# Altium PCB DAM16.PcbDoc
Units mm, origin at the board's own origin, x right, y up, seen from the top; angles counter-clockwise.
Board outline 151 x 82 mm, 4 copper layers (Top Layer, MidLayer1, MidLayer2, Bottom Layer), stack 0.778 mm thick; 96 components, 100 nets, 385 pads, 37 vias.
Unrouted connection lines stored in the file: 100.
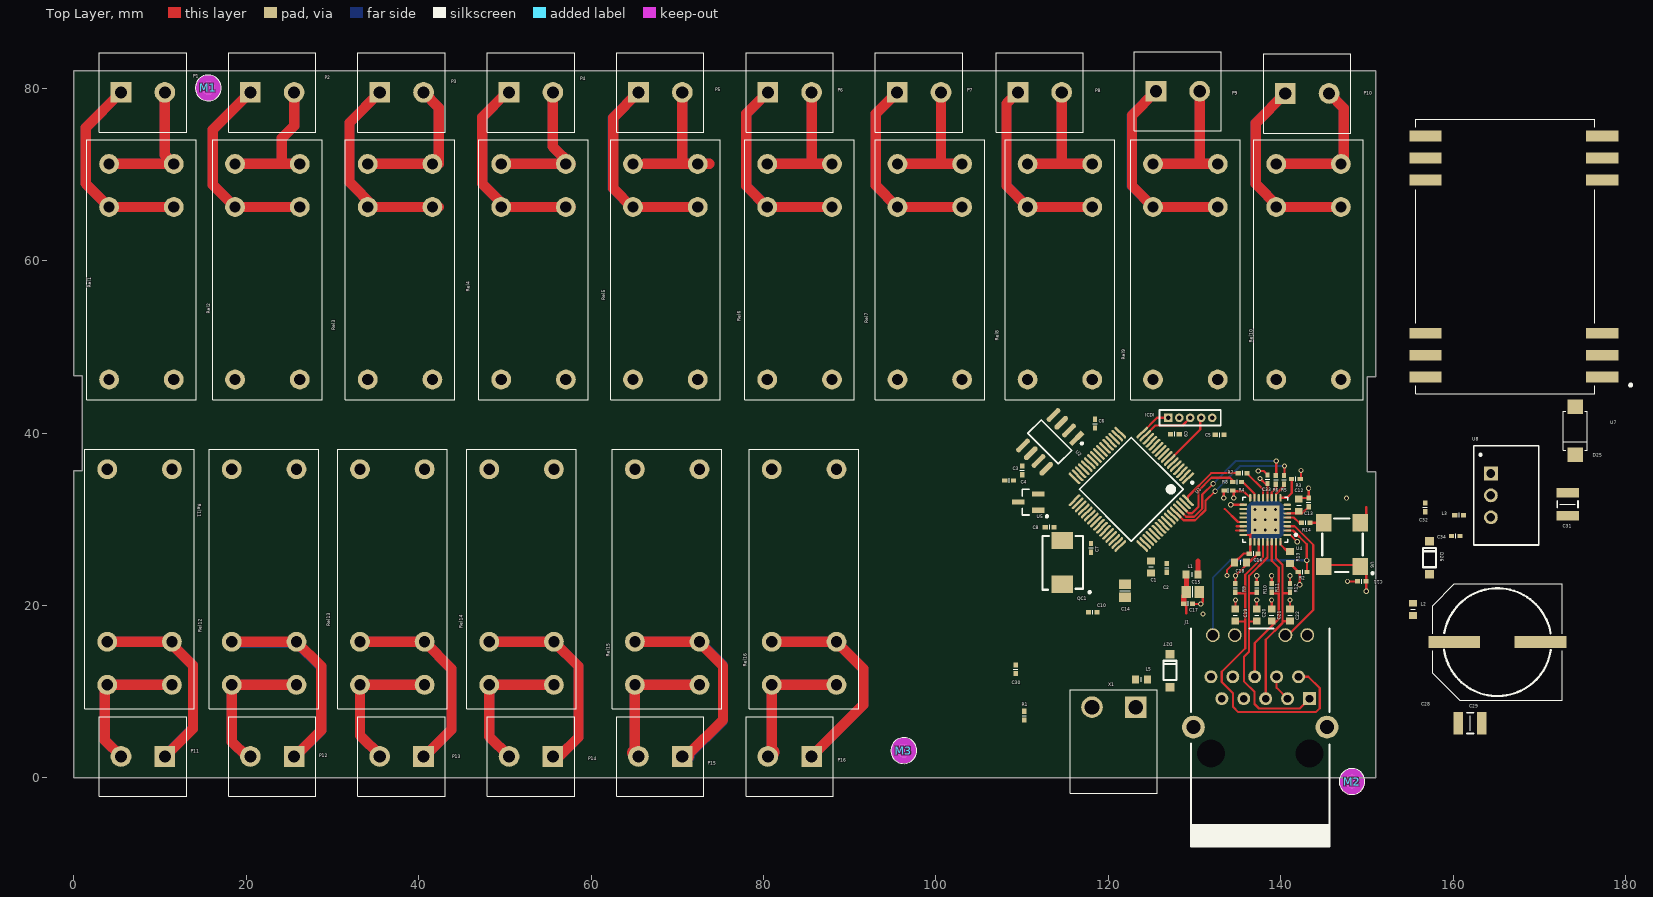
[diagram p0: Top Layer view]
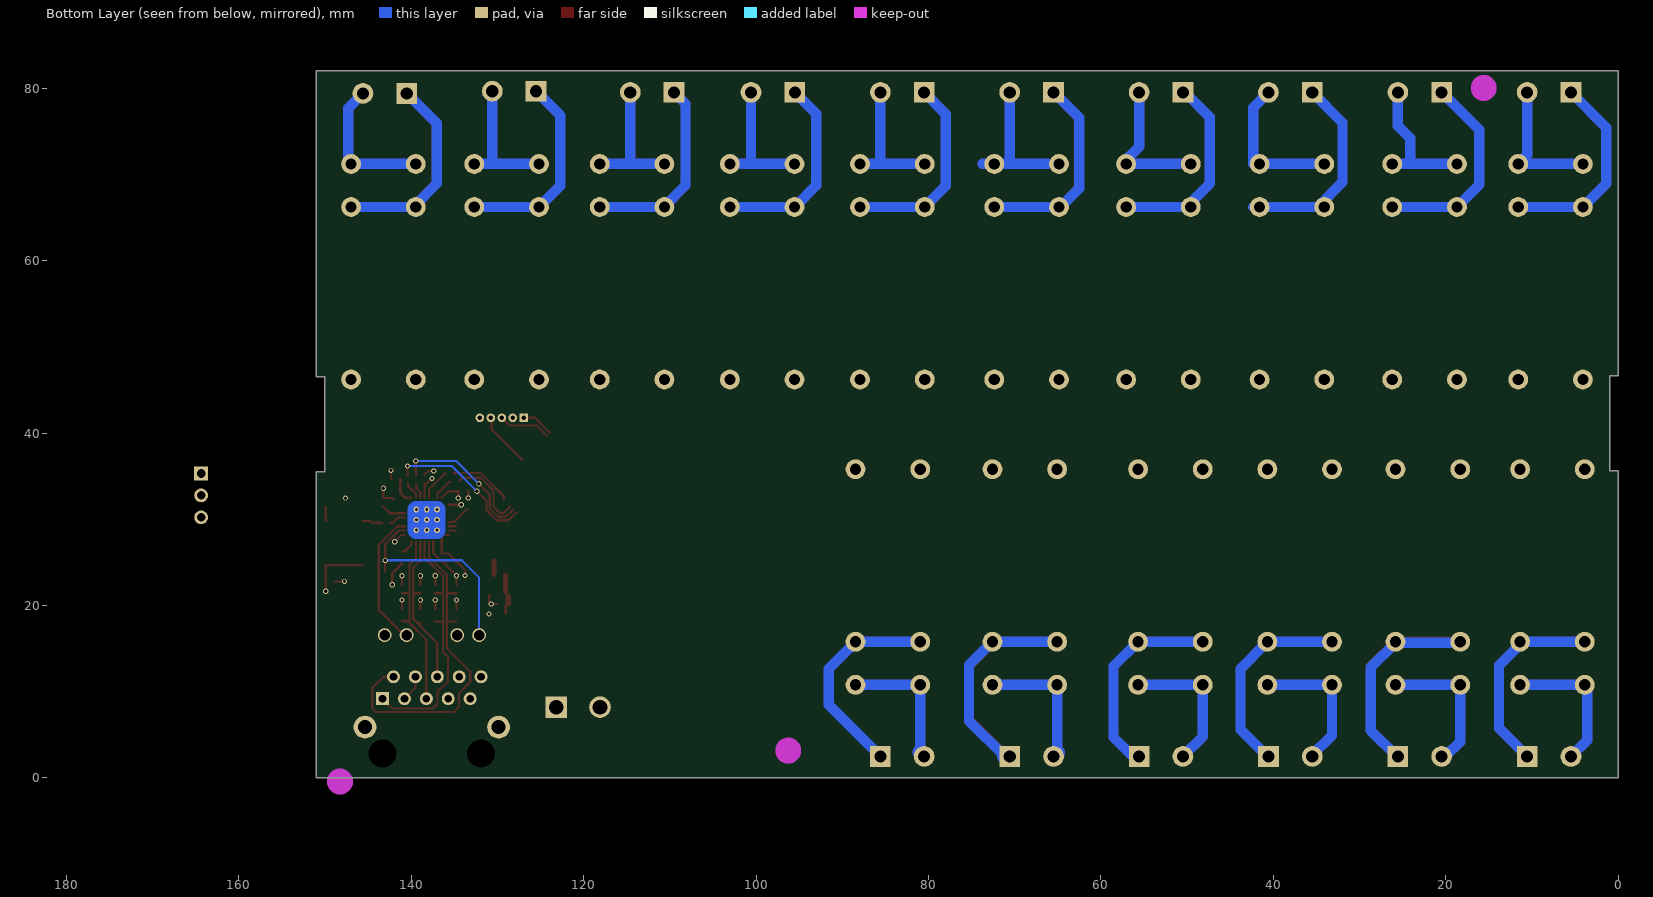
[diagram p1: Bottom Layer view, seen from below]
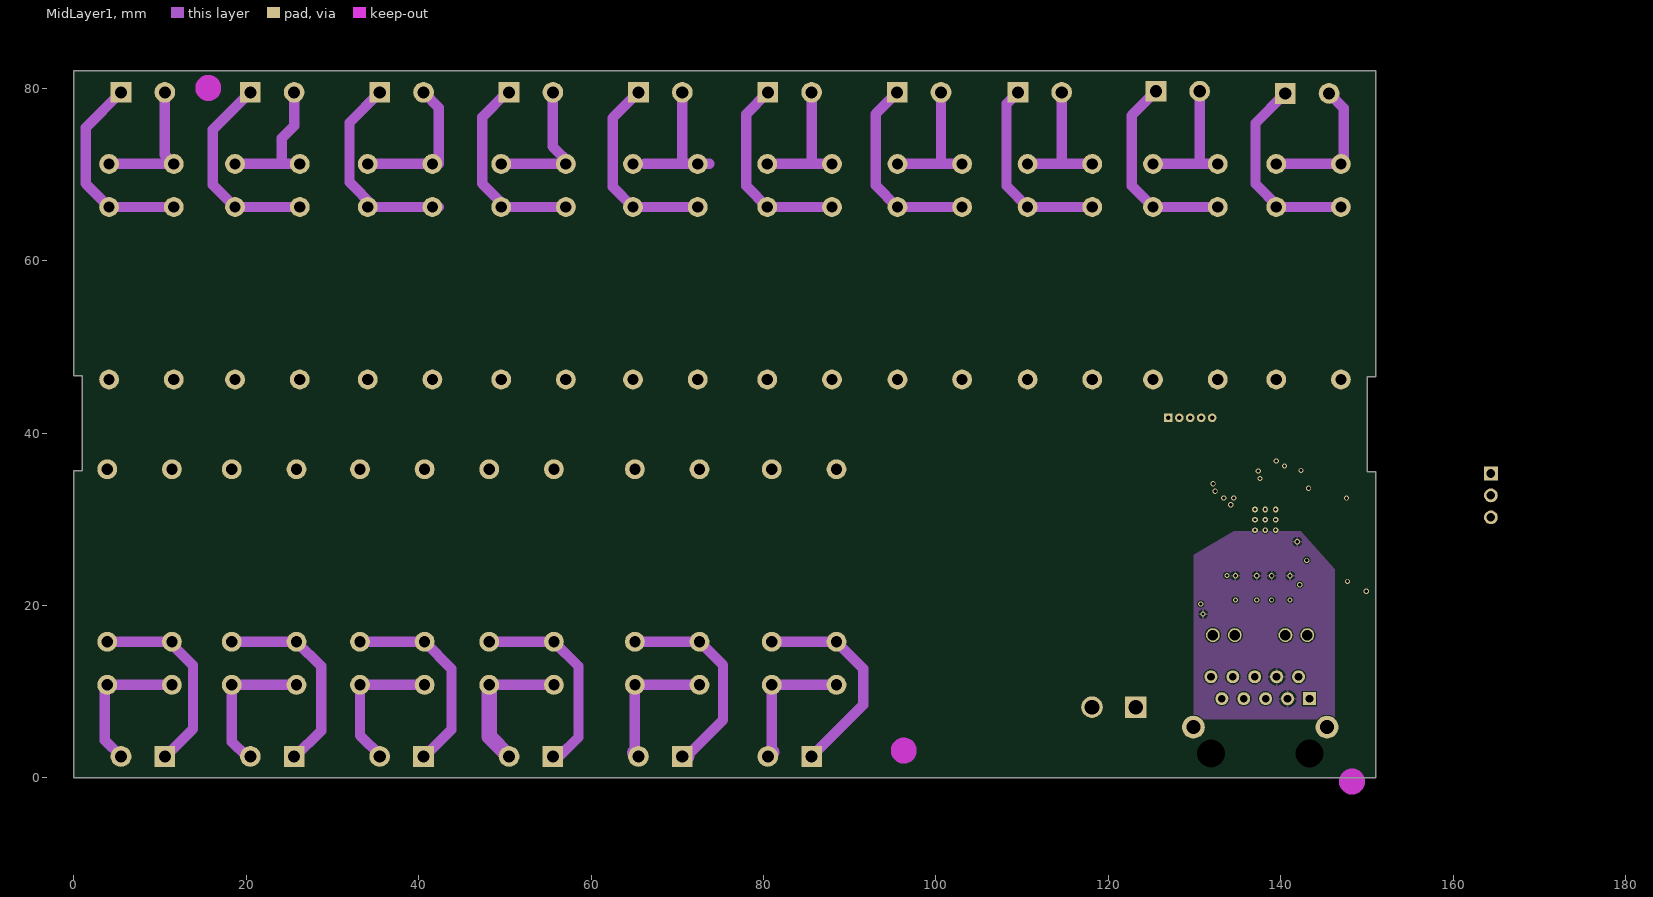
[diagram p2: MidLayer1]
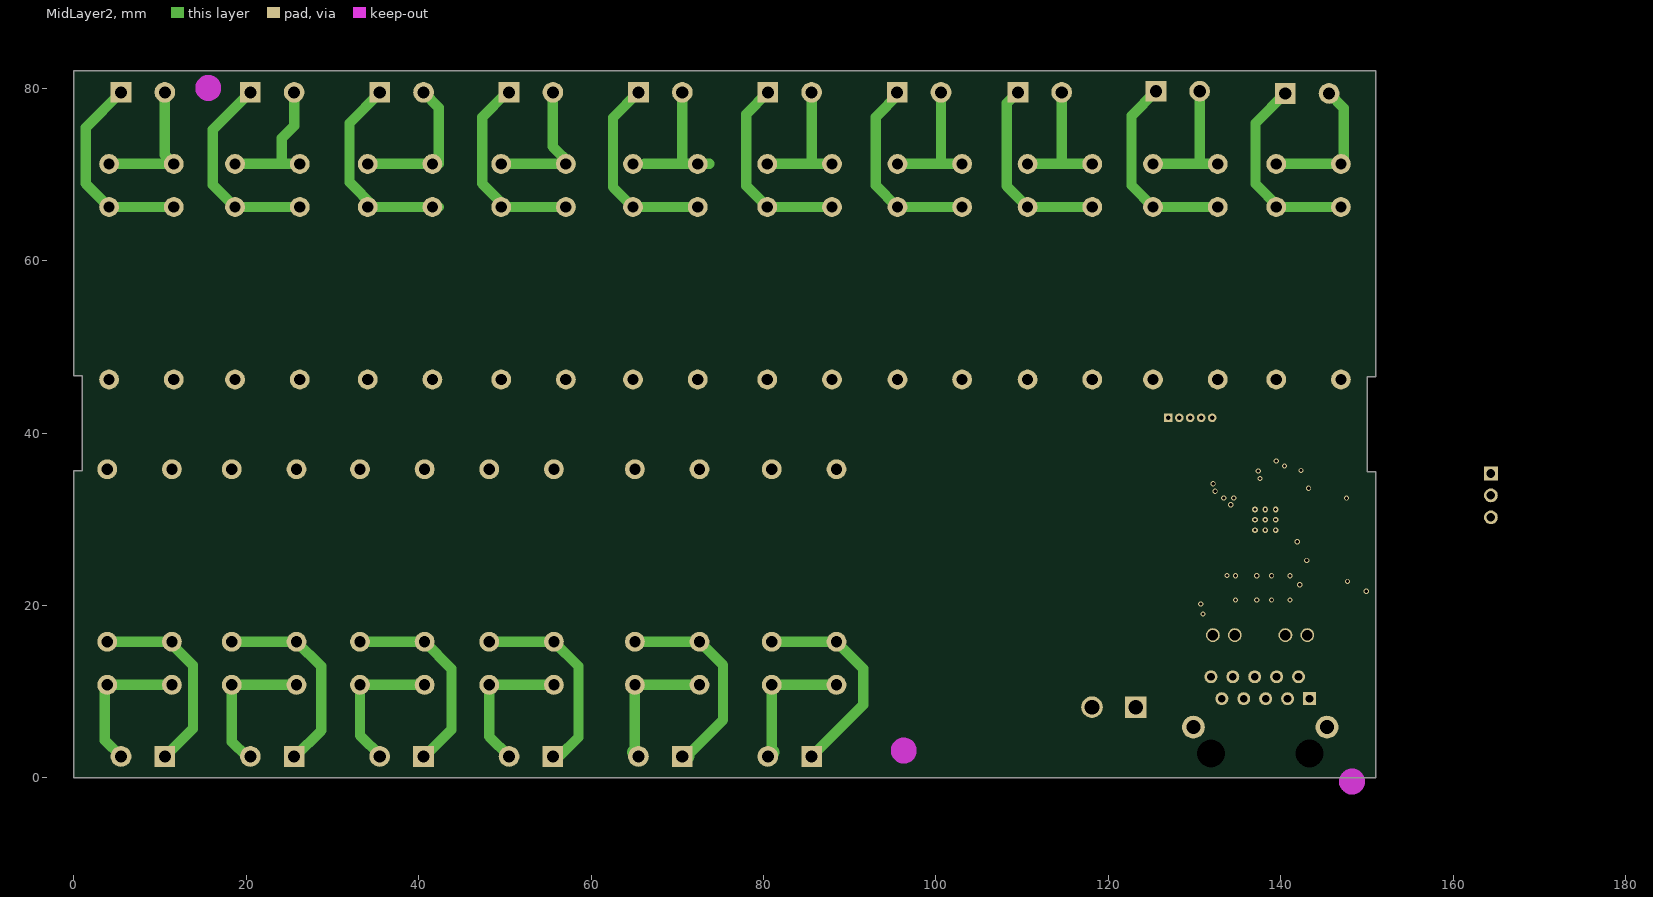
[diagram p3: MidLayer2]

## Layer stack, top to bottom
Top Solder: solder mask 0.0102, Solder Resist, Dk 3.5
Top Layer: signal copper 0.0356
Dielectric 1: core 0.254, FR-4, Dk 4.2
MidLayer1: signal copper 0.036
Dielectric 3: prepreg 0.127, Dk 4.2
MidLayer2: signal copper 0.036
Dielectric 2: core 0.254, Dk 4.2
Bottom Layer: signal copper 0.0356
Bottom Solder: solder mask 0.0102, Solder Resist, Dk 3.5

## Board outline
0,0 0,35.65 1,35.65 1,46.648 0,46.648 0,82 151,82 151,46.507 150,46.507 150,35.509 151,35.509 151,0

## Design rules (kind name [scope] priority, off if disabled: settings)
Clearance [All] p1: gap=0.12
HoleSize [All] p1: absolutevalues=TRUE maxlimit=4 minlimit=0.025 maxpercent=80.000 minpercent=20.000
PolygonConnect [All] p1: connectstyle=Relief reliefconductorwidth=0.254 reliefentries=4 polygonreliefangle="90 Angle" airgapwidth=0.254
RoomDefinition DAM16_Ethernet [InComponentClass('DAM16_Ethernet')] p1: confinementstyle=ConfineIn formatcopy=TRUE lockcomponents=FALSE outline -5.969,-6.096 183.007,-6.096 183.007,88.265 -5.969,88.265
RoomDefinition DAM16_Control [InComponentClass('DAM16_Control')] p2: confinementstyle=ConfineIn formatcopy=TRUE lockcomponents=FALSE outline -8.128,-3.683 183.896,-3.683 183.896,85.725 -8.128,85.725
RoomDefinition DAM16_Relays [InComponentClass('DAM16_Relays')] p3: confinementstyle=ConfineIn formatcopy=TRUE lockcomponents=FALSE outline -3.429,-2.54 191.77,-2.54 191.77,84.328 -3.429,84.328
RoutingVias [All] p1: holewidth=0.711 width=1.27 viastyle="Through Hole" minholewidth=0.3 minwidth=0.5 maxholewidth=0.711 maxwidth=1.27
SilkToBoardRegionClearance [HasFootprint('7499210124A')] p1:
SolderMaskExpansion [All] p1: expansion=0.102
UnpouredPolygon [All] p1: allowunpoured=FALSE
Width [All] p1: maxlimit=4 minlimit=0.254 preferedwidth=0.254
27 further rules are at their usual default settings.

## Classes and differential pairs
component class DAM16_Relays: P1 P2 P3 P4 P5 P6 P7 P8 P9 P10 P11 P12 P13 P14 P15 P16 Rel1 Rel2 Rel3 Rel4 Rel5 Rel6 Rel7 Rel8 Rel9 Rel10 Rel11 Rel12 Rel13 Rel14 Rel15 Rel16
component class DAM16_Control: C1 C2 C3 C4 C5 C6 C7 C8 C9 C10 C28 C29 C30 C31 C32 C34 D25 D26 D27 ICDI L2 L3 L5 M1 M2 M3 QC1 R1 U1 U2 U5 U7 U8 X1
component class DAM16_Ethernet: C11 C12 C13 C14 C15 C16 C17 C18 C19 C20 C21 C22 C33 J1 L1 R2 R3 R4 R5 R6 R7 R8 R9 R10 R11 R12 R13 R14 U4 U6

## Components (designator, comment, footprint, x,y, rotation, side; value= is the part's Value field where it differs from the comment)
C1 "10uF10V_0603" C0603 124.928,24.478 r270 top
C2 "100nF16V_0402" C0402 126.757,24.363 r270 top
C3 "100nF16V_0402" C0402 109.991,35.657 r90 top
C4 "100nF16V_0402" C0402 108.474,34.484 r180 top
C5 "100nF16V_0402" C0402 132.886,39.79 r0 top
C6 "100nF16V_0402" C0402 118.436,41.099 r90 top
C7 "22pF50V_0402" C0402 117.975,26.674 r270 top
C8 "22pF50V_0402" C0402 113.164,29.087 r180 top
C9 "100nF16V_0402" C0402 127.705,39.867 r180 top
C10 "100nF16V_0402" C0402 118.179,19.222 r180 top
C11 "100nF16V_0402" C0402 149.377,22.798 r180 top
C12 "1uF50V_0603" C0603 142.07,31.625 r90 top
C13 "470pF50V_0402" C0402 143.21,31.955 r90 top
C14 "4u7F25V_0805" C0805 121.917,21.706 r270 top
C15 "4u7F25V_0805" C0805 129.792,21.574 r0 top
C16 "100nF25V_0402" C0402 136.83,26.015 r180 top
C17 "100nF25V_0402" C0402 129.232,20.218 r0 top
C18 "22nF50V_0603" C0603 135.32,24.985 r180 top
C19 "10pF50V_0603" C0603 134.7,18.885 r90 top
C20 "10pF50V_0603" C0603 137.193,18.885 r90 top
C21 "10pF50V_0603" C0603 138.92,18.885 r90 top
C22 "10pF50V_0603" C0603 141.05,18.885 r90 top
C28 "470uF25V_POL" Panasonic-H13 165.1,15.748 r180 top
C29 "10uF50V_1210" C1210 161.925,6.35 r0 top
C30 "100nF25V_0402" C0402 109.232,12.607 r90 top
C31 "10uF25V_1210" C1210 173.228,31.75 r90 top
C32 "100nF25V_0402" C0402 156.718,31.369 r270 top
C33 "100nF25V_0402" C0402 138.437,34.648 r90 top
C34 "100nF25V_0402" C0402 160.274,28.067 r0 top
D25 "SMAJ58A-E3/61" DO214A 174.117,40.259 r270 top
D26 "RB160M-30TR" SOD123 157.226,25.527 r90 top
D27 "SD103AW-V-GS08" SOD123 127.127,12.446 r90 top
ICDI "ICDI" HDR1X5-1.27 129.476,41.759 r0 top
J1 "7499210124A" 7499210124A 137.59,2.845 r180 top
L1 "120R4A_0603" L0603 129.69,23.581 r0 top
L2 "300R2A_0603" L0603 155.321,19.558 r90 top
L3 "120R1.2A_0402" P0402 160.655,30.48 r180 top
L5 "10uF2A" L0603 123.825,11.43 r0 top
M1 "Mark" Mark-3mm 15.621,80.01 r0 top
M2 "Mark" Mark-3mm 148.238,-0.413 r0 top
M3 "Mark" Mark-3mm 96.266,3.175 r90 top
P1 "PHOENIX_1715721" Phoenix-2-5_08 8.04,79.5 r0 top
P2 "PHOENIX_1715721" Phoenix-2-5_08 23.04,79.5 r0 top
P3 "PHOENIX_1715721" Phoenix-2-5_08 38.04,79.5 r0 top
P4 "PHOENIX_1715721" Phoenix-2-5_08 53.04,79.5 r0 top
P5 "PHOENIX_1715721" Phoenix-2-5_08 68.04,79.5 r0 top
P6 "PHOENIX_1715721" Phoenix-2-5_08 83.04,79.5 r0 top
P7 "PHOENIX_1715721" Phoenix-2-5_08 98.04,79.5 r0 top
P8 "PHOENIX_1715721" Phoenix-2-5_08 112.04,79.5 r0 top
P9 "PHOENIX_1715721" Phoenix-2-5_08 128.04,79.629 r0 top
P10 "PHOENIX_1715721" Phoenix-2-5_08 143.04,79.375 r0 top
P11 "PHOENIX_1715721" Phoenix-2-5_08 8.04,2.5 r180 top
P12 "PHOENIX_1715721" Phoenix-2-5_08 23.04,2.5 r180 top
P13 "PHOENIX_1715721" Phoenix-2-5_08 38.04,2.5 r180 top
P14 "PHOENIX_1715721" Phoenix-2-5_08 53.04,2.5 r180 top
P15 "PHOENIX_1715721" Phoenix-2-5_08 68.04,2.5 r180 top
P16 "PHOENIX_1715721" Phoenix-2-5_08 83.04,2.5 r180 top
QC1 "7A-8.000MAAJ-T" TXC_7A 114.637,24.992 r90 top
R1 "10k_0402" R0402 110.236,7.239 r270 top
R2 "10k_0402" R0402 142.5,23.875 r0 top
R3 "10k_0402" R0402 141.727,34.661 r0 top
R4 "1k5_0402" R0402 133.915,33.329 r180 top
R5 "10R_0402" R0402 140.342,34.567 r270 top
R6 "10R_0402" R0402 139.403,34.567 r90 top
R7 "10R_0402" R0402 135.55,35.35 r180 top
R8 "10R_0402" R0402 134.907,34.318 r180 top
R9 "49R9_0402" R0402 134.7,22.045 r90 top
R10 "49R9_0402" R0402 137.193,22.045 r90 top
R11 "49R9_0402" R0402 138.92,22.045 r90 top
R12 "49R9_0402" R0402 141.05,22.045 r90 top
R13 "12k1_0603" R0603(1608) 141.05,25.565 r90 top
R14 "33R_0402" R0402 142.875,29.591 r180 top
Rel1 "Omron_G5RL-1A-E-HR" Omron-G5RL-HR 7.874,56.2 r90 top
Rel2 "Omron_G5RL-1A-E-HR" Omron-G5RL-HR 22.479,56.2 r90 top
Rel3 "Omron_G5RL-1A-E-HR" Omron-G5RL-HR 37.855,56.2 r90 top
Rel4 "Omron_G5RL-1A-E-HR" Omron-G5RL-HR 53.332,56.2 r90 top
Rel5 "Omron_G5RL-1A-E-HR" Omron-G5RL-HR 68.616,56.2 r90 top
Rel6 "Omron_G5RL-1A-E-HR" Omron-G5RL-HR 84.191,56.2 r90 top
Rel7 "Omron_G5RL-1A-E-HR" Omron-G5RL-HR 99.281,56.2 r90 top
Rel8 "Omron_G5RL-1A-E-HR" Omron-G5RL-HR 114.372,56.2 r90 top
Rel9 "Omron_G5RL-1A-E-HR" Omron-G5RL-HR 128.918,56.2 r90 top
Rel10 "Omron_G5RL-1A-E-HR" Omron-G5RL-HR 143.199,56.2 r90 top
Rel11 "Omron_G5RL-1A-E-HR" Omron-G5RL-HR 7.652,25.8 r270 top
Rel12 "Omron_G5RL-1A-E-HR" Omron-G5RL-HR 22.098,25.8 r270 top
Rel13 "Omron_G5RL-1A-E-HR" Omron-G5RL-HR 36.957,25.8 r270 top
Rel14 "Omron_G5RL-1A-E-HR" Omron-G5RL-HR 51.943,25.8 r270 top
Rel15 "Omron_G5RL-1A-E-HR" Omron-G5RL-HR 68.834,25.8 r270 top
Rel16 "Omron_G5RL-1A-E-HR" Omron-G5RL-HR 84.709,25.8 r270 top
U1 "PIC32MX695F512H-80I/PT" TQFP-64_N1 122.642,33.469 r225 top
U2 "25LC1024-I_SM" SOP8_N 113.199,38.968 r225 top
U4 "LAN8741-EN" 32M1-A_M 138.181,29.936 r180 top
U5 "11AA02E48T-I_TT" SOT23_M 110.707,31.991 r180 top
U6 "TXC-7W-50.000MBB-T" TXC_7W 147.066,27.051 r90 top
U7 "AG-9700-2BR" Ag9700-2BR 167.005,60.452 r90 top
U8 "R-783.3-0.5" R-783_3-0_5 164.338,32.766 r270 top
X1 "WR-TBL3127" WR-TBL-3127 120.627,8.215 r180 top

## Footprints (in the part's own frame and the unit in brackets; to place one, negate y for a bottom-side part, rotate by r counter-clockwise, add the part's x,y. Pads: shape width x height; smd on the part's side, far side on the other; paste and mask are expansions set on the pad)
32M1-A_M [mm] "QFN, 32-Leads, Body 5x5mm, Pitch 0.5mm, IPC Low Density"
  rect 0.9x0.25 smd: 1(-2.55,1.75)
  oval 0.9x0.25 smd: 2(-2.55,1.25) 3(-2.55,0.75) 4(-2.55,0.25) 5(-2.55,-0.25) 6(-2.55,-0.75) 7(-2.55,-1.25) 8(-2.55,-1.75) 17(2.55,-1.75) 18(2.55,-1.25) 19(2.55,-0.75) 20(2.55,-0.25) 21(2.55,0.25) 22(2.55,0.75) 23(2.55,1.25) 24(2.55,1.75)
  oval 0.25x0.9 smd: 9(-1.75,-2.55) 10(-1.25,-2.55) 11(-0.75,-2.55) 12(-0.25,-2.55) 13(0.25,-2.55) 14(0.75,-2.55) 15(1.25,-2.55) 16(1.75,-2.55) 25(1.75,2.55) 26(1.25,2.55) 27(0.75,2.55) 28(0.25,2.55) 29(-0.25,2.55) 30(-0.75,2.55) 31(-1.25,2.55) 32(-1.75,2.55)
  rect 3.3x3.3 smd: 33(0,0)
  silkscreen extent -3.68,-2.6 2.6,2.6, body extent -2.58,-2.58 2.58,2.58, height 1
7499210124A [mm] "Connector; PCB Jack, Thru-Hole; RJ45,POE; Shielded with Lightpipes; Right Angle"
  rect 1.5x1.5 hole 0.9: 1(-5.715,-6.35)
  round 1.5 hole 0.9: 2(-4.445,-8.89) 3(-3.175,-6.35) 4(-1.905,-8.89) 5(-0.635,-6.35) 6(0.635,-8.89) 7(1.905,-6.35) 8(3.175,-8.89) 9(4.445,-6.35) 10(5.715,-8.89)
  round 1.6 hole 1.2: 11(-5.465,-13.72) 12(-2.925,-13.72) 13(2.946,-13.72) 14(5.486,-13.72)
  round 2.65 hole 1.6: MH1(-7.745,-3.05) MH2(7.745,-3.05)
  round 2.95 hole 3.25 unplated: MH3(-5.715,0) MH4(5.715,0)
  silkscreen extent -8.02,-14.5 8.02,10.8, body extent -8.27,-14.51 8.13,10.79, height 13.81
Ag9700-2BR [mm] "Silvertel, Ag9700-Small"
  rect 1.25x3.75 smd: 1(-13.97,-10.25) 2(-11.43,-10.25) 3(-8.89,-10.25) 4(8.89,-10.25) 5(11.43,-10.25) 6(13.97,-10.25) 7(13.97,10.25) 8(11.43,10.25) 9(8.89,10.25) 10(-8.89,10.25) 11(-11.43,10.25) 12(-13.97,10.25)
  silkscreen extent -15.9,-13.69 15.9,11.35, body extent -15.9,-9.4 15.9,11.35, height 18
C0402 [mm] "Chip Capacitor, Body 1.0x0.5mm, IPC High Density"
  rect 0.6x0.5 smd: 1(-0.5,0) 2(0.5,0)
  silkscreen extent 0,-0.25 0,0.25, body extent -0.5,-0.25 0.5,0.25, height 0.5
C0603 [mm] "Chip Capacitor, 0603"
  rect 0.8x0.9 smd: 1(-0.7,0) 2(0.7,0)
  silkscreen extent 0,-0.25 0,0.25, body extent -0.8,-0.4 0.8,0.4, height 0.8
C0805 [mm] "Chip Capacitor, Body 2.0x1.3mm, IPC High Density"
  rect 1.1x1.4 smd: 1(-0.75,0) 2(0.75,0)
  silkscreen extent 0,-0.64 0,0.64, body extent -0.5,-0.25 0.5,0.25, height 0.5
C1210 [mm] "Chip Capacitor, Body 3.2x2.5mm, IPC High Density"
  rect 1.1x2.6 smd: 1(-1.35,0) 2(1.35,0)
  silkscreen extent -0.4,-1.2 0.4,1.2, body extent -1.6,-1.25 1.6,1.25, height 1.35
DO214A [mm] "Diode; 2 Leads"
  rect 1.7x1.8 smd: 1(2.8,0) 2(-2.8,0)
  silkscreen extent -2.25,-1.4 2.25,1.4, body extent -2.25,-1.4 2.25,1.4, height 2.3
HDR1X5-1.27 [mm] "Connector; Header; 5 Position"
  rect 1x1 hole 0.5: 1(-2.54,0)
  round 1 hole 0.5: 2(-1.27,0) 3(0,0) 4(1.27,0) 5(2.54,0)
  silkscreen extent -3.55,-0.9 3.55,0.9, body extent -3.56,-0.89 3.56,0.89, height 7
L0603 [mm] "Chip Ferrit, 0603"
  rect 0.8x0.9 smd: 1(-0.7,0) 2(0.7,0)
  silkscreen extent 0,-0.25 0,0.25, body extent -0.8,-0.4 0.8,0.4, height 0.8
Mark-3mm [mm]
  round 1.6 smd paste-2: 0(0,0)
  Keep-Out Layer circle w2: c0,0 r0.5
  silkscreen extent -1.5,-1.5 1.5,1.5
Omron-G5RL-HR [mm] "Omron-G5RL-HR series relay"
  round 2.3 hole 1.3: 1(-10,-3.75) 2(-10,3.75) 3(10,-3.75) 3(10,3.75) 4(15,-3.75) 4(15,3.75)
  silkscreen extent -12.32,-6.35 17.78,6.35, body extent -12.32,-6.35 16.68,6.35, height 15.9
P0402 [mm] "Chip, Body 1.0x0.5mm"
  rect 0.6x0.5 smd: 1(-0.5,0) 2(0.5,0)
  silkscreen extent 0,-0.25 0,0.25, body extent -0.55,-0.3 0.55,0.3, height 0.55
Panasonic-H13 [mm] "SMD electrolytic, Panasonic"
  rect 6x1.4 smd: 1(5,0) 2(-5,0)
  silkscreen extent -7.5,-6.75 7.5,6.75, body extent -7.5,-6.75 7.5,6.75, height 13
Phoenix-2-5_08 [mm] "Phoenix, 1715721"
  rect 2.4x2.4 hole 1.4: 1(-2.54,0)
  round 2.4 hole 1.4: 2(2.54,0)
  silkscreen extent -5.06,-4.6 5.06,4.6, body extent -5.05,-5.19 5.85,4.61, height 14.2
R0402 [mm] "Chip Resistor, Body 1.0x0.5mm"
  rect 0.6x0.5 smd: 1(-0.5,0) 2(0.5,0)
  silkscreen extent 0,-0.25 0,0.25, body extent -0.5,-0.24 0.5,0.26, height 0.4
R0603(1608) [mm] "Chip Resistor, 0603"
  rect 0.8x0.9 smd: 1(-0.7,0) 2(0.7,0)
  body extent -0.8,-0.4 0.8,0.4, height 0.5
R-783_3-0_5 [mm] "Recon DC-DC"
  rect 1.6x1.6 hole 1: 1(-2.54,0)
  round 1.6 hole 1: 2(0,0) 3(2.54,0)
  silkscreen extent -5.75,-2 5.75,5.55, body extent -5.72,-2.03 5.71,5.59, height 10.2
SOD123 [mm]
  rect 1x1 smd: 1(1.905,0) 2(-1.905,0)
  silkscreen extent -1.1,-0.76 1.14,0.76, body extent -1.4,-0.85 1.4,0.88, height 1.4
SOP8_N [mm] "SOIC, 8-Leads, Body 4.9x3.9mm, Pitch 1.27mm, IPC Medium Density"
  rect 2x0.6 smd: 1(-2.5,1.905)
  oval 2x0.6 smd: 2(-2.5,0.635) 3(-2.5,-0.635) 4(-2.5,-1.905) 5(2.5,-1.905) 6(2.5,-0.635) 7(2.5,0.635) 8(2.5,1.905)
  silkscreen extent -2.62,-2.5 1.1,2.88, body extent -3,-2.54 3,2.54, height 1.7
SOT23_M [mm] "SOT23, 3-Leads, Body 2.9x1.3mm, Pitch 0.95mm, Lead Span 2.3mm - Reverse Pinning, IPC Low Density"
  rect 1.45x0.6 smd: 1(1.175,0) 2(-1.175,-0.95) 3(-1.175,0.95)
  silkscreen extent -2.28,-1.5 0.7,1.78, body extent -1.15,-1.5 1.15,1.5, height 1.1
TQFP-64_N1 [mm] "64-Pin Thin Plastic Quad Flat Pack 0.5 mm Pitch, 1.0/0.1 mm Lead Form, IPC Medium Density"
  rect 1.8x0.3 smd: 1(-5.55,3.75)
  oval 1.8x0.3 smd: 2(-5.55,3.25) 3(-5.55,2.75) 4(-5.55,2.25) 5(-5.55,1.75) 6(-5.55,1.25) 7(-5.55,0.75) 8(-5.55,0.25) 9(-5.55,-0.25) 10(-5.55,-0.75) 11(-5.55,-1.25) 12(-5.55,-1.75) 13(-5.55,-2.25) 14(-5.55,-2.75) 15(-5.55,-3.25) 16(-5.55,-3.75) 33(5.55,-3.75) 34(5.55,-3.25) 35(5.55,-2.75) 36(5.55,-2.25) 37(5.55,-1.75) 38(5.55,-1.25) 39(5.55,-0.75) 40(5.55,-0.25) 41(5.55,0.25) 42(5.55,0.75) 43(5.55,1.25) 44(5.55,1.75) 45(5.55,2.25) 46(5.55,2.75) 47(5.55,3.25) 48(5.55,3.75)
  oval 0.3x1.8 smd: 17(-3.75,-5.55) 18(-3.25,-5.55) 19(-2.75,-5.55) 20(-2.25,-5.55) 21(-1.75,-5.55) 22(-1.25,-5.55) 23(-0.75,-5.55) 24(-0.25,-5.55) 25(0.25,-5.55) 26(0.75,-5.55) 27(1.25,-5.55) 28(1.75,-5.55) 29(2.25,-5.55) 30(2.75,-5.55) 31(3.25,-5.55) 32(3.75,-5.55) 49(3.75,5.55) 50(3.25,5.55) 51(2.75,5.55) 52(2.25,5.55) 53(1.75,5.55) 54(1.25,5.55) 55(0.75,5.55) 56(0.25,5.55) 57(-0.25,5.55) 58(-0.75,5.55) 59(-1.25,5.55) 60(-1.75,5.55) 61(-2.25,5.55) 62(-2.75,5.55) 63(-3.25,5.55) 64(-3.75,5.55)
  silkscreen extent -5.67,-4.25 4.25,4.57, body extent -5,-5 5,5, height 1.2
TXC_7A [mm]
  rect 2x2.5 smd: 1(-2.54,0) 2(2.54,0)
  silkscreen extent -3.57,-3.3 3.05,2.29, body extent -3.17,-2.41 3.05,2.25, height 1.3
TXC_7W [mm]
  rect 2x1.8 smd: 1(-2.54,-2.1) 2(2.54,-2.1) 3(2.54,2.1) 4(-2.54,2.1)
  silkscreen extent -3.43,-3.68 3.05,2.29, body extent -3.17,-2.41 3.05,2.25, height 1.3
WR-TBL-3127 [mm] "Header horizontal, 2 pins"
  rect 2.5x2.5 hole 1.7: 1(-2.54,0)
  round 2.5 hole 1.7: 2(2.54,0)
  silkscreen extent -5.04,-2 5.04,10, body extent -4.99,-1.91 5.01,10.09, height 8.75

## Part data
C1 C2 C3 C4 C5 C6 C9 C10 C11 C31: "Capacitor"
C7 C8: "Murata, GRM series, 50V"
C12: "C series, X5R, 10%"
C13: "AVX, 50V"
C14 C15: "TDK  C series, X7R, 10%, 25V"
C16 C17 C30 C32 C33 C34: "AVX, X5R, 10%, 25V"
C18: "AVX ,  X7R, 5%, 50V"
C19 C20 C21 C22: "AVX ,  +-0.5pF, 50V"
C28: "Panasonic, TG series"
C29: "AVX,  X7R, 10%, 50V"
D25: "TVS, 400W, 58V"
D26 D27: "Diode Schottky,2A,40V"
ICDI: "Header, 5-Pin"
J1: library part "Ethernet, POE, WE7499210124A", "Modular Jack , Right Angle RJ-45, Low Profile"
L1: "Murata, Ferrit, 120Rx2A"
L2: "WE, Ferrit, 300Rx2A"
L3: "Ferrit, 1.2A, 120R@100MHz"
L5: library part 300R2A_0603, "WE, Ferrit, 300Rx2A"
P1 P2 P3 P4 P5 P6 P7 P8 P9 P10 P11 P12 P13 P14 P15 P16: library part 2Pol_1715721, "Phoenix, 2 pol, 5.08mm, 22A, 715721"
QC1: library part Crystal_8MHz, "Crystal, 7A-8.000MAAJ-T"
R1 R2 R3 R4 R5 R6 R7 R8: "Vishay CRCW series, 125mW, 1%"
R9 R10 R11 R12 R14: "Vishay CRCW series, 63mW, 1%"
R13: "Vishay, CRCW series, 100mW, 1%"
Rel1 Rel2 Rel3 Rel4 Rel5 Rel6 Rel7 Rel8 Rel9 Rel10 Rel11 Rel12 Rel13 Rel14 Rel15 Rel16: "Omron_G5RL-1A-E-HR, 16A, 12V, 400mW"
U1: "High Performance ROM-less Microcontroller with External Memory Bus, 1.5K RAM, 64-Pin TQFP, 4.2 to 5.5V Supply Range, Industrial Temperature"
U2: "1024 Kbit Serial SPI Bus EEPROM"
U4: "Ethernet Phy"
U5: "2 kbit Serial  EEPROM"
U6: "Crystal"
U7: "PoE, 12V, 12W"
U8: library part Recom-R-783_3-0_5, "Voltage Regulator"
X1: library part Header-2-WR-TBL3127, "Header 2 pin, horizontal,WR-TBL3127"

## Via types
v1: diameter 0.6, hole 0.381, Top Layer to Bottom Layer, 28 vias
v2: diameter 0.66, hole 0.33, Top Layer to Bottom Layer, tented top, 9 vias

## Nets (pads, with @x,y where several pads share a name; then routed paths per layer and width w, separated by ;. In a path a pad name is that pad's centre, name@x,y a point inside that pad or via, vN(x,y) a via of type N, cw(c..) or ccw(c..) an arc to the next point about the centre after c; other vN are vias at no path point)
3V3: C2.1 C3.1 C4.1 C5.1 C6.1 C9.1 C10.2 C11.1 C14.1 C33.1 C34.1 ICDI.5 L1.2 L3.2 R1.2 R3.2 R4.2 U1.10 U1.19 U1.26 U1.38 U1.57 U2.3 U2.7 U2.8 U4.12 U5.2 U6.1 U6.4 | length 13.4
  Top Layer w0.254: v1(133.362,32.47) R4.2@133.362,33.329 ; v1@137.576,34.725 138.295,34.005 C33.1 ; U4.12 C33.1@138.431,34.141 ; R3.2@142.23,34.675 142.32,34.765 v1@142.32,35.478 ; U6.4@145.626,24.703 147.599,24.703 ; 147.607,24.711 147.599,24.703 ; v1(149.885,21.655) 149.885,24.644 149.826,24.703 147.599,24.703
  Top Layer w0.6: L1.2 130.39,25.155
  other v1: 147.599,32.45 137.564,34.713 142.32,35.665
12V: C30.1 D26.1 D27.1 U8.1
GND: C1.2 C2.2 C3.2 C4.2 C5.2 C6.2 C7.2 C8.2 C9.2 C10.1 C11.2 C12.2 C13.2 C14.2 C15.2 C16.2 C17.2 C18.2 C19.2 C20.2 C21.2 C22.2 C28.2 C29.2 C30.2 C31.2 C32.2 C33.2 C34.2 ICDI.2 J1.11 J1.13 J1.MH1 J1.MH2 R2.1 R13.1 U1.9 U1.20 U1.25 U1.41 U2.4 U4.24 U4.25 U4.33 U5.1 U6.2 U7.7 U8.2 X1.2 | length 34.2
  Top Layer w0.254: C17.2@130.013,20.19 v1@130.704,20.19 ; 130.922,20.408 C15.2@130.922,21.194 ; v1(133.73,23.475) 133.73,24.095 C18.2 135.65,26.015 C16.2 136.431,26.116 U4.25 136.431,28.186 ; C19.2@134.716,19.538 v1(134.716,20.635) ; U4.24 136.431,28.186 ; C20.2@137.193,19.538 C20.2 v1(137.193,20.635) ; v1(137.367,35.595) 137.99,35.595 C33.2 ; v2(138.181,29.936) v2(136.981,28.736) 136.431,28.186 ; C21.2@138.92,19.535 C21.2 v1(138.92,20.635) ; C22.2@141.05,19.575 C22.2 v1(141.05,20.635) ; C12.2 142.195,32.451 C13.2@143.21,32.451 ; C13.2 v1(143.21,33.595) ; v1(147.726,22.798) C11.2 ; U6.2@149.826,29.783 149.885,29.842 149.885,31.434
  Top Layer w0.3: R13.1 142.18,23.735 v1(142.18,22.405)
  Bottom Layer w2: v2(136.981,28.736) v2(136.981,29.936) v2(136.981,31.136) v2(138.181,31.136) v2(139.381,31.136) v2(139.381,29.936) v2(139.381,28.736) v2(138.181,28.736) 137.104,28.736 v2@137.104,28.692
  other v1: 130.692,20.178
NetC1_1: C1.1 U1.56
NetC7_1: C7.1 QC1.1 U1.40
NetC8_1: C8.1 QC1.2 U1.39
NetC12_1: C12.1 C13.1 U4.6 | length 2.8
  Top Layer w0.254: U4.6 142.441,30.686 C13.1
NetC15_1: C15.1 C16.1 C17.1 C18.1 J1.3 J1.4 L1.1 R9.2 R10.2 R11.2 R12.2 U4.1 U4.27 | length 17.7
  Top Layer w0.254: C17.1@128.742,20.208 128.99,19.93 ; 129.013,19.11 129.013,19.908 ; R9.2@134.716,22.415 v1(134.716,23.451) 136.02,24.755 C18.1 136.3,24.985 C16.1 137.431,26.116 U4.27 ; R10.2@137.193,22.415 v1@137.193,23.385 ; R11.2@138.92,22.415 v1@138.92,23.385 ; J1.4 139.495,10.465 J1.3 ; U4.1 141.09,28.186 v1(141.892,27.384) ; R12.2@141.05,22.415 v1@141.05,23.385
  Top Layer w0.6: C17.1 C15.1@128.732,21.098 ; C15.1 L1.1@129.042,23.529
  other v1: 130.962,19.002 137.193,23.451 138.92,23.451 141.05,23.451
NetC19_1: C19.1 J1.2 R9.1 U4.28 | length 39.8
  Top Layer w0.254: C19.1@134.716,18.138 135.859,18.138 ; R9.1@134.716,21.415 135.862,21.415 ; U4.28 137.931,25.637 135.862,23.568 135.862,21.415 ; J1.2 143.18,11.735 144.49,10.425 144.49,8.095 144.03,7.635 135.05,7.635 134.43,8.255 134.43,9.835 133.13,11.135 133.13,12.306 135.862,15.038 135.862,21.415
NetC20_1: C20.1 J1.1 R10.1 U4.29 | length 29.3
  Top Layer w0.254: C20.1@137.193,18.138 136.31,18.138 ; R10.1@137.193,21.415 136.31,21.415 ; U4.29 138.431,25.566 136.31,23.445 136.31,21.415 ; J1.1 142.165,8.055 137.45,8.055 136.92,8.585 136.92,9.985 135.73,11.175 135.73,14.075 136.31,14.655 136.31,18.138 ; 136.31,18.138 136.31,21.415
NetC21_1: C21.1 J1.6 R11.1 U4.30 | length 18.2
  Top Layer w0.254: J1.6 136.955,15.65 139.24,17.935 C21.1@138.92,17.935 ; R11.1@138.92,21.415 139.7,21.415 ; U4.30 138.931,25.189 139.75,24.369 139.75,18.435 C21.1@139.25,17.935
NetC22_1: C22.1 J1.5 R12.1 U4.31 | length 21
  Top Layer w0.254: J1.5 138.225,16.02 140.17,17.965 140.17,24.724 139.431,25.463 U4.31 ; 140.17,18.175 C22.1@141.05,18.175 ; 140.19,21.415 R12.1@141.05,21.415
NetC28_1: C28.1 L2.1 U7.8
NetC29_1: C29.1 D26.2 L2.2
NetC31_1: C31.1 C32.1 L3.1 U8.3
NetD25_1: D25.1 J1.9 U7.1
NetD25_2: D25.2 J1.10 U7.2
NetD27_2: D27.2 L5.2
NetICDI_1: ICDI.1 U1.16 | length 3.7
  Top Layer w0.254: U1.16 125.629,41.759 ICDI.1
NetICDI_3: ICDI.3 U1.15 | length 6.1
  Top Layer w0.254: U1.15 125.438,40.861 128.578,40.861 ICDI.3
NetICDI_4: ICDI.4 R1.1 U1.7 | length 6.5
  Top Layer w0.254: U1.7 130.63,40.396 130.63,41.759 ICDI.4
NetJ1_12: J1.12 U4.3 | length 15.9
  Top Layer w0.254: J1.12 140.82,16.565 143.74,19.485 143.74,27.029 141.583,29.186 U4.3
NetJ1_14: J1.14 R2.2 U4.2 | length 24.5
  Top Layer w0.254: U4.2 141.406,28.686 142.99,27.101 v1(142.99,25.235) 143,25.225 R2.2
  Bottom Layer w0.254: J1.14 132.104,23.219 134.12,25.235 v1(142.99,25.235)
NetL5_1: L5.1 X1.1
NetP1_1: P1.1 Rel1.3 | length 94.5
  Top Layer w1.2: P1.1 1.397,75.397 1.397,68.927 4.124,66.2 Rel1.3@11.624,66.2
  MidLayer1 w1.2: P1.1 1.397,75.397 1.397,68.927 4.124,66.2 Rel1.3@11.624,66.2
  MidLayer2 w1.2: P1.1 1.397,75.397 1.397,68.927 4.124,66.2 Rel1.3@11.624,66.2
  Bottom Layer w1.2: P1.1 1.397,75.397 1.397,68.927 4.124,66.2 Rel1.3@11.624,66.2
NetP1_2: P1.2 Rel1.4 | length 64.9
  Top Layer w1.2: Rel1.4@4.124,71.2 11.624,71.2 10.58,72.244 P1.2
  MidLayer1 w1.2: Rel1.4@4.124,71.2 11.624,71.2 10.58,72.244 P1.2
  MidLayer2 w1.2: Rel1.4@4.124,71.2 11.624,71.2 10.58,72.244 P1.2
  Bottom Layer w1.2: Rel1.4@4.124,71.2 8.509,71.2 11.624,71.2 10.58,72.244 P1.2
NetP2_1: P2.1 Rel2.3 | length 94.8
  Top Layer w1.2: P2.1@20.473,79.528 16.129,75.184 16.129,68.8 18.729,66.2 Rel2.3@26.229,66.2
  MidLayer1 w1.2: P2.1@20.473,79.528 16.129,75.184 16.129,68.8 18.729,66.2 Rel2.3@26.229,66.2
  MidLayer2 w1.2: P2.1@20.473,79.528 16.129,75.184 16.129,68.8 18.729,66.2 Rel2.3@26.229,66.2
  Bottom Layer w1.2: P2.1@20.473,79.528 16.129,75.184 16.129,68.8 18.729,66.2 Rel2.3@26.229,66.2
NetP2_2: P2.2 Rel2.4 | length 65.3
  Top Layer w1.2: Rel2.4@18.729,71.2 24.14,71.2 ; P2.2 25.58,75.618 24.14,74.178 24.14,71.2 ; Rel2.4@26.229,71.2 24.14,71.2
  MidLayer1 w1.2: Rel2.4@18.729,71.2 24.003,71.2 Rel2.4@26.229,71.2 ; 24.14,71.337 24.14,74.178 25.58,75.618 P2.2
  MidLayer2 w1.2: Rel2.4@18.729,71.2 24.13,71.2 Rel2.4@26.229,71.2 ; 24.14,71.21 24.14,74.178 25.58,75.618 P2.2
  Bottom Layer w1.2: Rel2.4@18.729,71.2 24.003,71.2 Rel2.4@26.229,71.2 ; 24.14,71.337 24.14,74.178 25.58,75.618 P2.2
NetP3_1: P3.1 Rel3.3 | length 93.7
  Top Layer w1.2: P3.1 32.004,76.004 32.004,69.054 34.858,66.2 Rel3.3@42.358,66.2
  MidLayer1 w1.2: P3.1 32.004,76.004 32.004,69.054 34.858,66.2 Rel3.3@42.358,66.2
  MidLayer2 w1.2: P3.1@35.529,79.471 32.004,75.946 32.004,69.054 34.858,66.2 Rel3.3@42.358,66.2
  Bottom Layer w1.2: P3.1 32.004,76.004 32.004,69.054 34.858,66.2 Rel3.3@42.358,66.2
NetP3_2: P3.2 Rel3.4 | length 66.1
  Top Layer w1.2: Rel3.4@34.858,71.2 42.358,71.2 42.358,77.722 P3.2
  MidLayer1 w1.2: Rel3.4@34.858,71.2 42.358,71.2 42.358,77.722 P3.2
  MidLayer2 w1.2: Rel3.4@34.858,71.2 42.358,71.2 42.358,77.722 P3.2
  Bottom Layer w1.2: Rel3.4@34.858,71.2 42.358,71.2 42.358,77.722 P3.2
NetP4_1: P4.1 Rel4.3 | length 92.5
  Top Layer w1.2: P4.1@50.26,79.5 47.371,76.611 47.371,68.927 50.098,66.2 Rel4.3@57.598,66.2
  MidLayer1 w1.2: P4.1@50.26,79.5 47.371,76.611 47.371,68.927 50.098,66.2 Rel4.3@57.598,66.2
  MidLayer2 w1.2: P4.1@50.26,79.5 47.371,76.611 47.371,68.927 50.098,66.2 Rel4.3@57.598,66.2
  Bottom Layer w1.2: P4.1@50.26,79.5 47.371,76.611 47.371,68.927 50.098,66.2 Rel4.3@57.598,66.2
NetP4_2: P4.2 Rel4.4 | length 66.5
  Top Layer w1.2: Rel4.4@50.098,71.2 57.598,71.2 55.58,73.218 P4.2
  MidLayer1 w1.2: Rel4.4@50.098,71.2 57.598,71.2 55.58,73.218 P4.2
  MidLayer2 w1.2: Rel4.4@50.098,71.2 55.372,71.2 57.598,71.2 55.58,73.218 P4.2
  Bottom Layer w1.2: Rel4.4@50.098,71.2 57.598,71.2 55.58,73.218 P4.2
NetP5_1: P5.1 Rel5.3 | length 92.3
  Top Layer w1.2: Rel5.3@64.857,66.068 62.564,68.361 62.564,76.564 P5.1 ; Rel5.3@64.866,66.434 65.1,66.2 Rel5.3@72.366,66.2
  MidLayer1 w1.2: P5.1 62.53,76.53 62.53,68.536 64.866,66.2 Rel5.3@72.366,66.2
  MidLayer2 w1.2: P5.1 62.547,76.547 62.547,68.519 64.866,66.2 Rel5.3@72.366,66.2
  Bottom Layer w1.2: Rel5.3@64.857,66.068 62.53,68.395 62.53,76.53 P5.1 ; Rel5.3@64.866,66.2 Rel5.3@72.366,66.2
NetP5_2: P5.2 Rel5.4 | length 62.8
  Top Layer w1.2: 66.227,71.2 70.612,71.2 73.727,71.2 ; 70.58,71.232 P5.2
  MidLayer1 w1.2: 66.227,71.2 73.727,71.2 ; 70.58,71.295 P5.2
  MidLayer2 w1.2: 66.227,71.2 70.866,71.2 73.727,71.2 ; 70.58,71.486 P5.2
  Bottom Layer w1.2: 66.227,71.2 70.612,71.2 73.727,71.2 ; 70.58,71.232 P5.2
NetP6_1: P6.1 Rel6.3 | length 91.4
  Top Layer w1.2: P6.1 78.002,77.002 78.002,68.639 80.441,66.2 Rel6.3@87.941,66.2
  MidLayer1 w1.2: P6.1 77.983,76.983 77.983,68.658 80.441,66.2 Rel6.3@87.941,66.2
  MidLayer2 w1.2: P6.1 77.983,76.983 77.983,68.688 80.471,66.2 Rel6.3@87.916,66.2
  Bottom Layer w1.2: P6.1 77.983,76.983 77.983,68.688 80.471,66.2 Rel6.3@87.941,66.2
NetP6_2: P6.2 Rel6.4 | length 61.9
  Top Layer w1.2: Rel6.4@80.441,71.2 Rel6.4@87.941,71.2 ; 85.58,71.247 P6.2
  MidLayer1 w1.2: 81.594,71.2 Rel6.4@87.93,71.2 ; 85.58,71.247 P6.2
  MidLayer2 w1.2: Rel6.4@80.441,71.2 Rel6.4@87.93,71.2 ; 85.58,71.2 P6.2
  Bottom Layer w1.2: Rel6.4@80.441,71.2 Rel6.4@87.941,71.2 ; 85.58,71.2 P6.2
NetP7_1: P7.1 Rel7.3 | length 91.7
  Top Layer w1.2: P7.1 93.029,77.029 93.029,68.702 95.531,66.2 Rel7.3@103.031,66.2
  MidLayer1 w1.2: P7.1@95.631,79.629 92.997,76.995 92.997,68.734 95.531,66.2 Rel7.3@103.031,66.2
  MidLayer2 w1.2: P7.1@95.758,79.375 92.997,76.614 92.997,68.734 95.531,66.2 Rel7.3@103.031,66.2
  Bottom Layer w1.2: P7.1 92.997,76.997 92.997,68.734 95.531,66.2 Rel7.3@103.031,66.2
NetP7_2: P7.2 Rel7.4 | length 62.8
  Top Layer w1.2: Rel7.4@95.563,71.2 100.584,71.2 Rel7.4@103.031,71.2 ; 100.58,71.204 P7.2
  MidLayer1 w1.2: Rel7.4@95.531,71.2 100.33,71.2 Rel7.4@103.031,71.2 ; 100.58,71.45 P7.2
  MidLayer2 w1.2: Rel7.4@95.563,71.2 100.584,71.2 Rel7.4@103.031,71.2 ; 100.58,71.204 P7.2
  Bottom Layer w1.2: Rel7.4@95.563,71.2 100.584,71.2 Rel7.4@103.031,71.2 ; 100.58,71.204 P7.2
NetP8_1: P8.1 Rel8.3 | length 89.7
  Top Layer w1.2: P8.1@109.728,79.5 109.474,79.5 108.182,78.208 108.182,68.64 110.622,66.2 Rel8.3@118.213,66.2
  MidLayer1 w1.2: P8.1@109.5,79.502 108.182,78.184 108.182,68.64 110.622,66.2 Rel8.3@118.122,66.2
  MidLayer2 w1.2: P8.1@109.474,79.5 108.19,78.216 108.19,68.632 Rel8.3@110.622,66.2 ; Rel8.3@110.698,66.2 Rel8.3@118.136,66.2
  Bottom Layer w1.2: P8.1@109.474,79.5 108.173,78.199 108.173,68.725 Rel8.3@110.698,66.2 ; Rel8.3@110.622,66.2 Rel8.3@118.136,66.2
NetP8_2: P8.2 Rel8.4 | length 62.4
  Top Layer w1.2: Rel8.4@110.622,71.2 114.935,71.2 Rel8.4@118.122,71.2 ; 114.58,71.555 P8.2
  MidLayer1 w1.2: Rel8.4@110.622,71.2 114.808,71.2 Rel8.4@118.122,71.2 ; 114.58,71.428 P8.2
  MidLayer2 w1.2: Rel8.4@110.622,71.2 114.681,71.2 Rel8.4@118.122,71.2 ; 114.58,71.301 P8.2
  Bottom Layer w1.2: Rel8.4@110.622,71.2 114.479,71.2 Rel8.4@118.122,71.2 ; 114.58,71.301 P8.2
NetP9_1: P9.1 Rel9.3 | length 90
  Top Layer w1.2: Rel9.3@125.067,66.2 Rel9.3@132.668,66.2 ; Rel9.3@125.168,66.2 122.729,68.639 122.729,76.858 P9.1
  MidLayer1 w1.2: Rel9.3@125.168,66.2 122.691,68.677 122.691,76.82 P9.1 ; Rel9.3@126.052,66.2 Rel9.3@132.668,66.2
  MidLayer2 w1.2: Rel9.3@125.168,66.2 122.672,68.696 122.672,76.801 P9.1@125.476,79.605 ; Rel9.3@126.052,66.2 Rel9.3@132.7,66.2
  Bottom Layer w1.2: Rel9.3@125.168,66.2 122.691,68.677 122.691,76.82 P9.1 ; Rel9.3@125.966,66.2 Rel9.3@132.668,66.2
NetP9_2: P9.2 Rel9.4 | length 63.4
  Top Layer w1.2: Rel9.4@125.168,71.2 130.556,71.2 Rel9.4@132.668,71.2 ; 130.58,71.224 P9.2
  MidLayer1 w1.2: Rel9.4@125.168,71.2 130.556,71.2 Rel9.4@132.668,71.2 ; 130.58,71.224 P9.2
  MidLayer2 w1.2: Rel9.4@125.168,71.2 130.556,71.2 Rel9.4@132.668,71.2 ; 130.58,71.224 P9.2
  Bottom Layer w1.2: Rel9.4@125.168,71.2 130.683,71.2 Rel9.4@132.566,71.2 ; 130.58,71.303 P9.2
NetP10_1: P10.1 Rel10.3 | length 92.9
  Top Layer w1.2: P10.1 137.056,75.931 137.056,68.906 139.762,66.2 Rel10.3@147.262,66.2
  MidLayer1 w1.2: P10.1@140.462,79.337 137.048,75.923 137.048,68.914 139.762,66.2 Rel10.3@147.262,66.2
  MidLayer2 w1.2: P10.1 137.048,75.923 137.048,68.914 139.762,66.2 Rel10.3@147.262,66.2
  Bottom Layer w1.2: P10.1 137.034,75.909 137.034,68.928 139.762,66.2 Rel10.3@147.262,66.2
NetP10_2: P10.2 Rel10.4 | length 65.6
  Top Layer w1.2: Rel10.4@139.762,71.2 147.273,71.2 147.273,77.682 P10.2
  MidLayer1 w1.2: Rel10.4@139.762,71.2 147.273,71.2 147.273,77.682 P10.2
  MidLayer2 w1.2: Rel10.4@139.762,71.2 147.297,71.2 147.297,77.658 P10.2
  Bottom Layer w1.2: Rel10.4@139.762,71.2 147.285,71.2 147.285,77.67 P10.2
NetP11_1: P11.1 Rel11.3 | length 93
  Top Layer w1.2: Rel11.3@3.616,15.8 11.116,15.8 13.843,13.073 13.843,5.688 P11.1@10.655,2.5
  MidLayer1 w1.2: Rel11.3@3.616,15.8 11.116,15.8 13.843,13.073 13.843,5.675 P11.1@10.668,2.5
  MidLayer2 w1.2: Rel11.3@3.616,15.8 11.116,15.8 13.843,13.073 13.843,5.688 P11.1@10.655,2.5
  Bottom Layer w1.2: Rel11.3@3.616,15.8 11.116,15.8 13.843,13.073 13.843,5.753 P11.1@10.59,2.5
NetP11_2: P11.2 Rel11.4 | length 66.3
  Top Layer w1.2: P11.2 3.616,4.384 3.616,10.8 Rel11.4@11.116,10.8
  MidLayer1 w1.2: P11.2 3.616,4.384 3.616,10.8 Rel11.4@11.116,10.8
  MidLayer2 w1.2: P11.2 3.616,4.384 3.616,10.8 Rel11.4@11.116,10.8
  Bottom Layer w1.2: P11.2 3.616,4.384 3.616,10.8 Rel11.4@11.116,10.8
NetP12_1: P12.1 Rel12.3 | length 92.8
  Top Layer w1.2: Rel12.3@18.348,15.8 25.848,15.8 28.702,12.946 28.702,5.514 P12.1@25.688,2.5
  MidLayer1 w1.2: Rel12.3@18.348,15.8 25.848,15.8 28.702,12.946 28.702,5.48 P12.1@25.722,2.5
  MidLayer2 w1.2: Rel12.3@18.348,15.8 25.848,15.8 28.702,12.946 28.702,5.497 P12.1@25.705,2.5
  Bottom Layer w1.2: Rel12.3@18.467,15.681 25.848,15.681 28.702,12.827 28.702,5.497 P12.1@25.705,2.5
  Bottom Layer w1.8: Rel12.3@18.348,15.8 Rel12.3@18.467,15.681
NetP12_2: P12.2 Rel12.4 | length 66
  Top Layer w1.2: P12.2@20.06,2.5 18.348,4.212 18.348,10.8 Rel12.4@25.848,10.8
  MidLayer1 w1.2: P12.2@20.06,2.5 18.348,4.212 18.348,10.8 Rel12.4@25.848,10.8
  MidLayer2 w1.2: P12.2@20.06,2.5 18.348,4.212 18.348,10.8 Rel12.4@25.848,10.8
  Bottom Layer w1.2: P12.2@20.06,2.5 18.348,4.212 18.348,10.8 Rel12.4@25.848,10.8
NetP13_1: P13.1 Rel13.3 | length 93.4
  Top Layer w1.2: Rel13.3@33.207,15.8 40.707,15.8 43.815,12.692 43.815,5.575 P13.1@40.74,2.5
  MidLayer1 w1.2: Rel13.3@33.207,15.8 40.707,15.8 43.815,12.692 43.815,5.575 P13.1@40.74,2.5
  MidLayer2 w1.2: Rel13.3@33.207,15.8 40.707,15.8 43.815,12.692 43.815,5.575 P13.1@40.74,2.5
  Bottom Layer w1.2: Rel13.3@33.207,15.8 40.707,15.8 43.815,12.692 43.815,5.575 P13.1@40.74,2.5
NetP13_2: P13.2 Rel13.4 | length 67.3
  Top Layer w1.2: P13.2@35.66,2.5 33.207,4.953 33.207,10.8 Rel13.4@40.707,10.8
  MidLayer1 w1.2: P13.2@35.66,2.5 33.207,4.953 33.207,10.8 Rel13.4@40.707,10.8
  MidLayer2 w1.2: P13.2@35.66,2.5 33.207,4.953 33.207,10.8 Rel13.4@40.707,10.8
  Bottom Layer w1.2: P13.2@35.66,2.5 33.207,4.953 33.207,10.8 Rel13.4@40.707,10.8
NetP14_1: P14.1 Rel14.3 | length 91.6
  Top Layer w1.2: Rel14.3@48.193,15.8 55.693,15.8 58.547,12.946 58.547,4.707 P14.1@56.34,2.5
  MidLayer1 w1.2: Rel14.3@48.193,15.8 55.693,15.8 58.547,12.946 58.547,4.707 P14.1@56.34,2.5
  MidLayer2 w1.2: Rel14.3@48.193,15.8 55.693,15.8 58.547,12.946 58.547,4.707 P14.1@56.34,2.5
  Bottom Layer w1.2: Rel14.3@48.193,15.8 55.693,15.8 58.547,12.946 58.547,4.707 P14.1@56.34,2.5
NetP14_2: P14.2 Rel14.4 | length 67
  Top Layer w1.2: P14.2 48.193,4.807 48.193,10.8 Rel14.4@55.693,10.8
  MidLayer1 w1.2: Rel14.4@48.193,10.8 Rel14.4@55.693,10.8
  MidLayer1 w1.8: Rel14.4@48.193,10.8 48.193,4.807 P14.2
  MidLayer2 w1.2: P14.2 48.193,4.807 48.193,10.8 Rel14.4@55.693,10.8
  Bottom Layer w1.2: P14.2 48.193,4.807 48.193,10.8 Rel14.4@55.693,10.8
NetP15_1: P15.1 Rel15.3 | length 96.3
  Top Layer w1.2: Rel15.3@65.084,15.8 Rel15.3@72.584,15.8 ; P15.1@71.068,2.5 75.311,6.743 75.311,12.954 Rel15.3@72.584,15.681
  Top Layer w1.8: P15.1 P15.1@71.068,2.5 ; Rel15.3@72.584,15.681 Rel15.3@72.584,15.8
  MidLayer1 w1.2: Rel15.3@65.084,15.8 72.584,15.8 75.311,13.073 75.311,6.725 P15.1@71.118,2.532
  MidLayer1 w1.8: P15.1@70.824,2.532 P15.1@71.118,2.532
  MidLayer2 w1.2: Rel15.3@65.084,15.8 72.584,15.8 75.311,13.073 75.311,6.743 P15.1@71.1,2.532
  MidLayer2 w1.8: P15.1@70.824,2.532 P15.1@71.1,2.532
  Bottom Layer w1.2: Rel15.3@65.084,15.8 72.584,15.8 75.311,13.073 75.311,6.639 P15.1@71.172,2.5
  Bottom Layer w1.8: P15.1 P15.1@71.172,2.5
NetP15_2: P15.2 Rel15.4 | length 64.1
  Top Layer w1.2: P15.2@65.084,2.916 65.084,10.8 Rel15.4@72.584,10.8
  Top Layer w1.8: P15.2@65.084,2.916 P15.2
  MidLayer1 w1.2: P15.2@65.084,2.916 65.084,10.8 Rel15.4@72.584,10.8
  MidLayer1 w1.8: P15.2@65.084,2.916 P15.2
  MidLayer2 w1.2: P15.2@65.084,3.003 65.084,10.8 Rel15.4@72.584,10.8
  MidLayer2 w1.8: P15.2@65.084,3.003 P15.2@65.693,2.394
  Bottom Layer w1.2: P15.2@65.084,2.916 65.084,10.8 Rel15.4@72.584,10.8
  Bottom Layer w1.8: P15.2@65.084,2.916 P15.2
NetP16_1: P16.1 Rel16.3 | length 98.3
  Top Layer w1.2: Rel16.3@80.959,15.8 88.459,15.8 91.567,12.692 91.567,8.487 P16.1
  MidLayer1 w1.2: Rel16.3@80.959,15.8 88.459,15.8 91.567,12.692 91.567,8.487 P16.1
  MidLayer2 w1.2: Rel16.3@80.959,15.8 88.459,15.8 91.567,12.692 91.567,8.487 P16.1
  Bottom Layer w1.2: Rel16.3@80.959,15.8 88.459,15.8 91.567,12.692 91.567,8.487 P16.1
NetP16_2: P16.2 Rel16.4 | length 64
  Top Layer w1.2: P16.2@80.959,2.959 80.959,10.8 Rel16.4@88.459,10.8
  Top Layer w1.8: P16.2 P16.2@80.959,2.959
  MidLayer1 w1.2: P16.2@80.959,2.959 80.959,10.8 Rel16.4@88.459,10.8
  MidLayer1 w1.8: P16.2 P16.2@80.959,2.959
  MidLayer2 w1.2: P16.2@80.959,2.959 80.959,10.8 Rel16.4@88.459,10.8
  MidLayer2 w1.8: P16.2 P16.2@80.959,2.959
  Bottom Layer w1.2: P16.2@80.959,2.959 80.959,10.8 Rel16.4@88.459,10.8
  Bottom Layer w1.8: P16.2 P16.2@80.959,2.959
NetR3_1: R3.1 U4.9 | length 3.2
  Top Layer w0.254: U4.9 140.707,32.486 141.257,33.035 R3.1@141.257,34.661
NetR4_1: R4.1 U1.49 U4.16 | length 3
  Top Layer w0.254: v1(134.526,32.47) 134.526,33.254 135.662,33.254 U4.16
NetR5_1: R5.1 U1.60 | length 17.4
  Top Layer w0.254: U1.60 128.708,29.878 130.049,29.878 131.249,31.078 131.249,32.13 v1(132.365,33.246) ; R5.1 140.462,35.186 140.372,35.276 140.402,35.306 v1@140.402,36.176
  Bottom Layer w0.254: v1(132.365,33.246) 135.295,36.176 v1(140.4,36.176)
NetR5_2: R5.2 U4.10 | length 2
  Top Layer w0.254: U4.10 139.431,32.936 140.342,33.848 R5.2 R5.2@140.342,34.11
NetR6_1: R6.1 U4.11 | length 1.8
  Top Layer w0.254: U4.11 138.931,33.122 139.403,33.594 R6.1
NetR6_2: R6.2 U1.61 | length 17.1
  Top Layer w0.254: U1.61 129.006,30.287 129.929,30.287 130.875,31.233 130.875,32.859 v1(132.135,34.119) ; R6.2 139.31,35.159 139.473,35.322 139.444,35.351 v1(139.445,36.745)
  Bottom Layer w0.254: v1(132.135,34.119) 134.761,36.745 v1(139.445,36.745)
NetR7_1: R7.1 U4.13 | length 3.6
  Top Layer w0.254: R7.1@136.038,35.338 137.931,33.444 U4.13
NetR7_2: R7.2 U1.64 | length 7.5
  Top Layer w0.254: U1.64 129.218,32.644 131.924,35.35 R7.2 R7.2@134.946,35.246
NetR8_1: R8.1 U4.15 | length 2.5
  Top Layer w0.254: R8.1 135.554,34.318 136.931,32.942 U4.15
NetR8_2: R8.2 U1.62 | length 9.1
  Top Layer w0.254: U1.62 129.312,30.688 129.682,30.688 130.448,31.454 130.448,33.316 131.933,34.801 134.099,34.801 R8.2@134.4,34.5
NetR13_2: R13.2 U4.32 | length 1.8
  Top Layer w0.254: U4.32 139.931,27.085 140.75,26.265 R13.2
NetR14_1: R14.1 U6.3 | length 2.3
  Top Layer w0.254: R14.1 144.526,29.591 144.718,29.783 U6.3@145.626,29.783
NetR14_2: R14.2 U4.5 | length 1.9
  Top Layer w0.254: U4.5 141.518,30.186 142.113,29.591 R14.2
NetU1_1: U1.1 U4.21 | length 2.8
  Top Layer w0.254: 133.49,31.205 135.01,29.686 U4.21
NetU1_2: U1.2 U4.22 | length 0.8
  Top Layer w0.254: 134.88,29.186 U4.22
NetU1_3: U1.3 U4.23 | length 0.9
  Top Layer w0.254: 134.77,28.686 U4.23
NetU1_4: U1.4
NetU1_5: U1.5
NetU1_6: U1.6
NetU1_11: U1.11
NetU1_12: U1.12
NetU1_13: U1.13
NetU1_17: U1.17
NetU1_18: U1.18 U2.1
NetU1_21: U1.21
NetU1_22: U1.22
NetU1_23: U1.23
NetU1_24: U1.24
NetU1_27: U1.27
NetU1_29: U1.29 U2.6
NetU1_30: U1.30 U4.17 | length 1.5
  Top Layer w0.254: v1(134.18,31.686) U4.17
NetU1_31: U1.31 U2.2
NetU1_32: U1.32 U2.5
NetU1_33: U1.33 U5.3
NetU1_42: U1.42
NetU1_43: U1.43
NetU1_45: U1.45
NetU1_46: U1.46
NetU1_50: U1.50
NetU1_51: U1.51
NetU1_52: U1.52
NetU1_53: U1.53
NetU1_54: U1.54
NetU1_55: U1.55
pads on no net: J1.7 J1.8 J1.MH3 J1.MH4 M1.0 M2.0 M3.0 Rel1.1 Rel1.2 Rel2.1 Rel2.2 Rel3.1 Rel3.2 Rel4.1 Rel4.2 Rel5.1 Rel5.2 Rel6.1 Rel6.2 Rel7.1 Rel7.2 Rel8.1 Rel8.2 Rel9.1 Rel9.2 Rel10.1 Rel10.2 Rel11.1 Rel11.2 Rel12.1 Rel12.2 Rel13.1 Rel13.2 Rel14.1 Rel14.2 Rel15.1 Rel15.2 Rel16.1 Rel16.2 U1.8 U1.14 U1.28 U1.34 U1.35 U1.36 U1.37 U1.44 U1.47 U1.48 U1.58 U1.59 U1.63 U4.4 U4.7 U4.8 U4.14 U4.18 U4.19 U4.20 U4.26 U7.3 U7.4 U7.5 U7.6 U7.9 U7.10 U7.11 U7.12

## Polygon pours and split planes (outlines as drawn)
NetC15_1 on MidLayer1 "3V3-1" (solid, pour order 5): 146.24,6.815 146.24,24.22 146.226,24.22 142.283,28.605 134.537,28.605 129.89,25.864 129.89,6.815

## Other copper
Top Layer:
  text "MN7" at 187.028,81.462 h2.2
  text "DAM 10" at 186.952,79.405 h1.27
  text "PN10013" at 186.863,77.55 h1.3

## Silkscreen, mask and mechanical layers (free items; w line width, h text height)
Top Solder:
  text "MN7" at 187.048,81.509 h2.2
  text "DAM 10" at 186.962,79.465 h1.27
  text "PN10013" at 186.873,77.61 h1.3
Mechanical 18:
  lines w0.05: 144.285,34.08 144.298,34.08 ; 145.285,29.59 141.729,33.654 134.744,33.654 130.553,31.114 130.553,13.461 145.298,13.461 145.298,19.43 145.298,29.59 ; 145.301,33.826 145.314,33.826 ; 120.67,13.435 120.67,81.544 151.361,81.544 151.361,13.434 145.873,13.434 145.872,29.539 141.885,34.06 134.735,34.06 134.735,34.098 130.099,31.241 130.099,13.435 120.67,13.435
Mechanical 19:
  lines w0.05: 120.61,0.164 151.488,0.164 151.488,81.714 120.61,81.714 120.61,0.164
Measure:
  lines w0.05: -9.727,61 152.578,61 ; -4.939,21 155.417,21 ; -2.255,41 153.856,41 ; 75.438,-6.223 75.5,90.424 ; 89.789,90.424 93.853,90.424 ; 92.661,-7.752 92.661,12.545 ; 100,-6.961 100,13.79
Outline:
  the board outline again, w0.05

## Dimensions
136.454,77.504 to 133.794,74.521 on Mechanical 16
5.5,79.5 to 20.5,79.5 on Mechanical 16
140.5,79.375 to 125.5,79.629 on Mechanical 16
75.5,90.424 to 95.5,79.5 on Mechanical 16
75.5,90.424 to 80.5,79.5 on Mechanical 16
0,82 to 75.5,90.424 on Mechanical 16
0,0 to 0,82 on Mechanical 16
0,0 to 151,0 on Mechanical 16
92.622,-7.174 to 100,-6.961 on Mechanical 16
-4.939,21 to -9.727,61 on Mechanical 16
-4.939,21 to 0,0 on Mechanical 16
0,82 to -9.727,61 on Mechanical 16